# EAGLE board sensor (EAGLE 9.6.2)
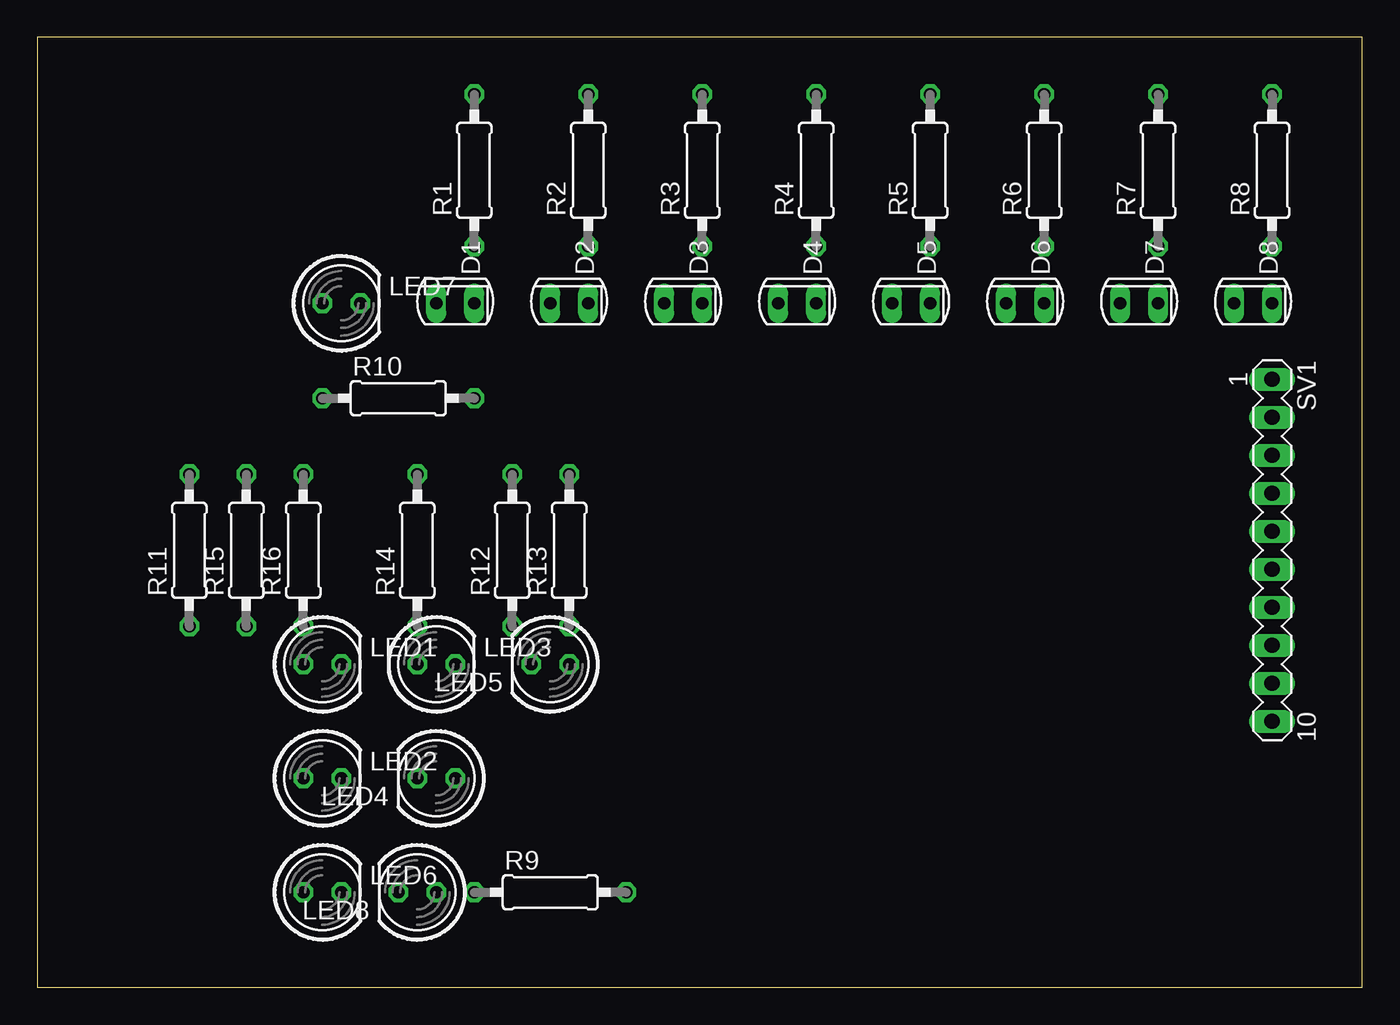
[diagram p0: board, top side]
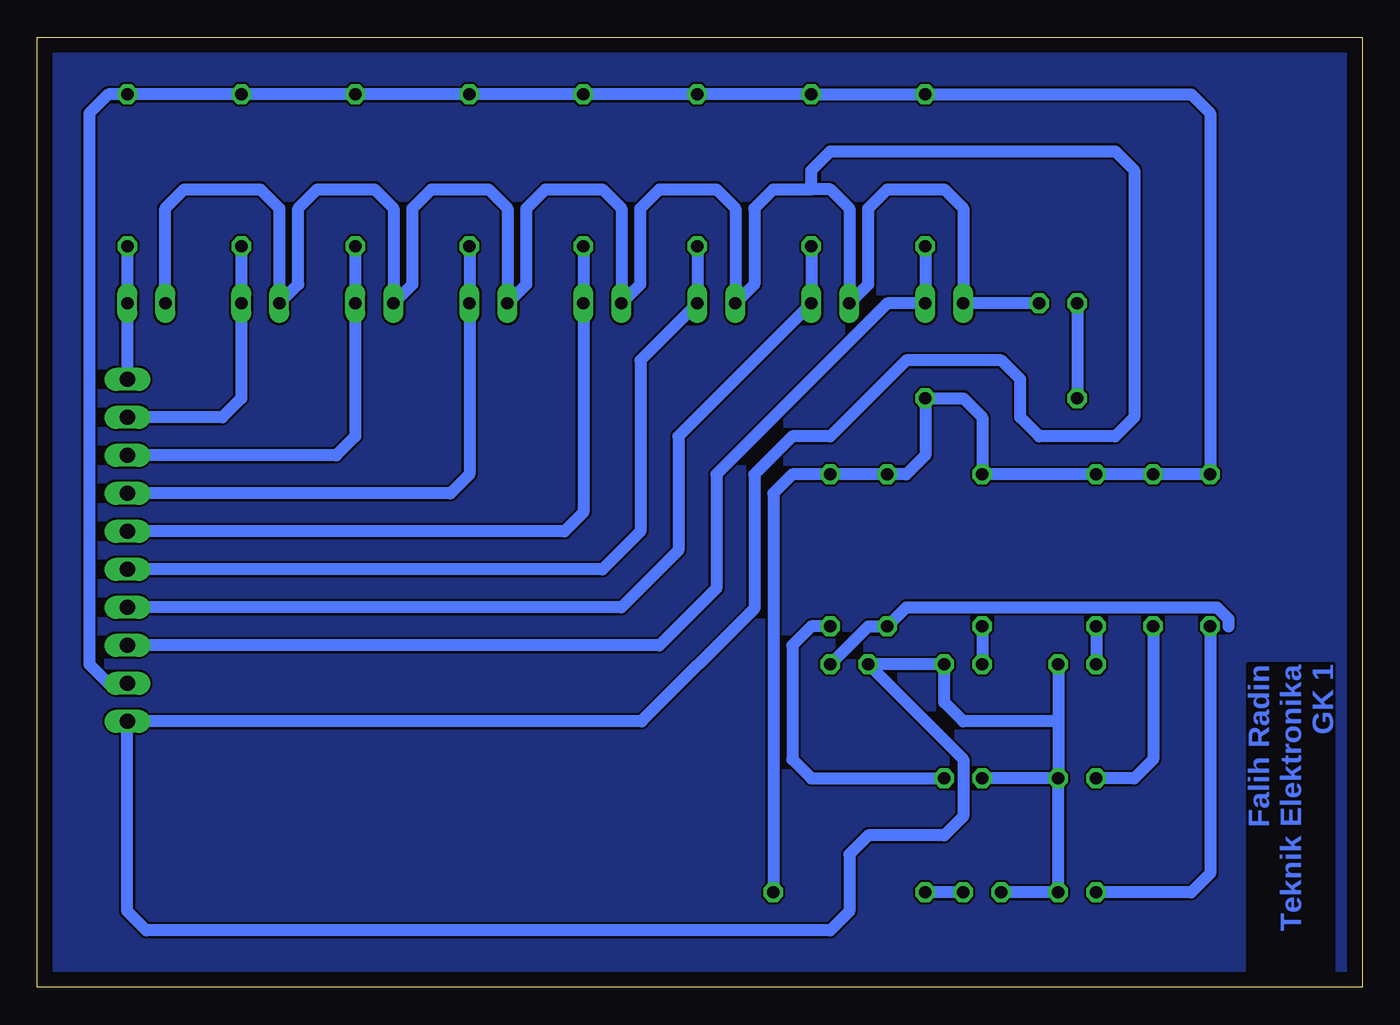
[diagram p1: board, bottom side, seen from below]

Size 88.57 x 63.49 mm. Coordinates in mm from the lower left corner, seen from the top.
Outline: 0,0 88.57,0 88.57,63.49 0,63.49 0,0
Copper layers (1*16): Top 0.035mm / dielectric 1.5mm / Bottom 0.035mm
Design rules "default": minimum track width 6mil, minimum drill 0.35mm, track to track 6mil, track to pad 6mil, pad to pad 6mil, via to via 6mil, smd to smd 6mil, copper to edge 40mil, drill to drill 6mil, minimum pad ring 10mil, minimum via ring 8mil, stop-mask expansion 4mil, vias tented up to drill 0mil, thermal gap 10mil

## Footprints (pad centres in the part's own frame; a part is rotated, then mirrored left to right if it is on the bottom)
SFH225 = drill 0.813 long: A 0,1.27; K 0,-1.27
LED5MM = drill 0.813 octagon: A -1.27,0; K 1.27,0
0207/10 = drill 0.813 octagon: 1 -5.08,0; 2 5.08,0
MA10-1 = drill 1.016 long: 1 -11.43,0; 2 -8.89,0; 3 -6.35,0; 4 -3.81,0; 5 -1.27,0; 6 1.27,0; 7 3.81,0; 8 6.35,0; 9 8.89,0; 10 11.43,0

## Placement (x,y rotation side)
D1  PhotoDioda  [SFH225]  27.94,45.72 90 top
D2  PhotoDioda  [SFH225]  35.56,45.72 90 top
D3  PhotoDioda  [SFH225]  43.18,45.72 90 top
D4  PhotoDioda  [SFH225]  50.8,45.72 90 top
D5  PhotoDioda  [SFH225]  58.42,45.72 90 top
D6  PhotoDioda  [SFH225]  66.04,45.72 90 top
D7  PhotoDioda  [SFH225]  73.66,45.72 90 top
D8  PhotoDioda  [SFH225]  81.28,45.72 90 top
LED1  LED putih SB  [LED5MM]  19.05,21.59 0 top
LED2  LED putih SB  [LED5MM]  19.05,13.97 0 top
LED3  LED putih SB  [LED5MM]  26.67,21.59 0 top
LED4  LED putih SB  [LED5MM]  26.67,13.97 180 top
LED5  LED putih SB  [LED5MM]  34.29,21.59 180 top
LED6  LED putih SB  [LED5MM]  19.05,6.35 0 top
LED7  LED putih SB  [LED5MM]  20.32,45.72 0 top
LED8  LED putih SB  [LED5MM]  25.4,6.35 180 top
R1  [0207/10]  29.21,54.61 90 top
R2  [0207/10]  36.83,54.61 90 top
R3  [0207/10]  44.45,54.61 90 top
R4  [0207/10]  52.07,54.61 90 top
R5  [0207/10]  59.69,54.61 90 top
R6  [0207/10]  67.31,54.61 90 top
R7  [0207/10]  74.93,54.61 90 top
R8  [0207/10]  82.55,54.61 90 top
R9  330  [0207/10]  34.29,6.35 0 top
R10  330  [0207/10]  24.13,39.37 0 top
R11  330  [0207/10]  10.16,29.21 90 top
R12  330  [0207/10]  31.75,29.21 90 top
R13  330  [0207/10]  35.56,29.21 90 top
R14  330  [0207/10]  25.4,29.21 90 top
R15  330  [0207/10]  13.97,29.21 90 top
R16  330  [0207/10]  17.78,29.21 90 top
SV1  [MA10-1]  82.55,29.21 270 top

## Library data of the parts
D1-D8 = opto-trans-siemens
LED1-LED8 = led
R1-R16 = resistor
SV1 = con-lstb

## Nets
GND: D1.A D2.A D3.A D4.A D5.A D6.A D7.A D8.A LED1.K LED2.K LED3.K LED4.K LED5.K LED6.K LED7.K LED8.K SV1.10
N$1: LED7.A R10.1
N$2: D7.K R7.1 SV1.2
N$3: D8.K R8.1 SV1.1
N$4: D1.K R1.1 SV1.8
N$5: D2.K R2.1 SV1.7
N$6: D3.K R3.1 SV1.6
N$7: D5.K R5.1 SV1.4
N$8: D4.K R4.1 SV1.5
N$9: D6.K R6.1 SV1.3
N$10: LED6.A R11.1
N$11: LED5.A R12.1
N$12: LED4.A R13.1
N$13: LED3.A R14.1
N$14: LED2.A R15.1
N$15: LED1.A R16.1
N$16: LED8.A R9.1
VCC: R1.2 R2.2 R3.2 R4.2 R5.2 R6.2 R7.2 R8.2 R9.2 R10.2 R11.2 R12.2 R13.2 R14.2 R15.2 R16.2 SV1.9

## Tracks (layer width: path | path; a pad name or v marks a point on that pad's centre or on a via)
GND
  Bottom 0.813: D8.A 80.01,52.07 78.74,53.34 73.66,53.34 72.39,52.07 D7.A 71.12,46.99 71.12,52.07 69.85,53.34 66.04,53.34 64.77,52.07 D6.A 63.5,46.99 63.5,52.07 62.23,53.34 58.42,53.34 57.15,52.07 D5.A 55.88,46.99 55.88,52.07 54.61,53.34 50.8,53.34 49.53,52.07 D4.A 48.26,46.99 48.26,52.07 46.99,53.34 43.18,53.34 41.91,52.07 D3.A 40.64,46.99 40.64,52.07 39.37,53.34 36.83,53.34 | 36.83,53.34 35.56,53.34 34.29,52.07 D2.A 33.02,46.99 33.02,52.07 31.75,53.34 27.94,53.34 26.67,52.07 D1.A LED7.K | 36.83,53.34 36.83,54.61 35.56,55.88 16.51,55.88 15.24,54.61 15.24,38.1 16.51,36.83 21.59,36.83 22.86,38.1 22.86,40.64 24.13,41.91 30.48,41.91 35.56,36.83 38.1,36.83 40.64,34.29 40.64,25.31 48.16,17.78 SV1.10 82.55,5.08 81.28,3.81 35.56,3.81 34.29,5.08 34.29,8.89 33.02,10.16 27.94,10.16 26.67,11.43 26.67,15.24 LED5.K LED3.K 27.94,19.05 26.67,17.78 20.32,17.78 | LED1.K 20.32,17.78 | 20.32,17.78 LED2.K | LED2.K LED6.K LED8.K | LED2.K LED4.K
N$1
  Bottom 0.813: LED7.A R10.1
N$2
  Bottom 0.813: R7.1 D7.K 74.93,39.37 76.2,38.1 SV1.2
N$3
  Bottom 0.813: R8.1 D8.K SV1.1
N$4
  Bottom 0.813: R1.1 D1.K 31.75,45.72 43.18,34.29 43.18,26.67 46.99,22.86 SV1.8
N$5
  Bottom 0.813: R2.1 D2.K 45.72,36.83 45.72,29.21 49.53,25.4 SV1.7
N$6
  Bottom 0.813: R3.1 D3.K 48.26,41.91 48.26,30.48 50.8,27.94 SV1.6
N$7
  Bottom 0.813: R5.1 D5.K 59.69,34.29 60.96,33.02 SV1.4
N$8
  Bottom 0.813: R4.1 D4.K 52.07,31.75 53.34,30.48 SV1.5
N$9
  Bottom 0.813: R6.1 D6.K 67.31,36.83 68.58,35.56 SV1.3
N$10
  Bottom 0.813: R11.1 10.16,7.62 11.43,6.35 LED6.A
N$11
  Bottom 0.813: 8.94,24.13 8.94,24.64 9.71,25.4 30.48,25.4 R12.1 33.02,24.13 LED5.A
N$12
  Bottom 0.813: R13.1 36.83,24.13 38.1,22.86 38.1,15.24 36.83,13.97 LED4.A
N$13
  Bottom 0.813: R14.1 LED3.A
N$14
  Bottom 0.813: R15.1 13.97,15.24 15.24,13.97 LED2.A
N$15
  Bottom 0.813: R16.1 LED1.A
N$16
  Bottom 0.813: LED8.A R9.1
N$17
  pour Bottom: 0,63.5 88.9,63.5 88.9,0 0,0
VCC
  Bottom 0.813: R2.2 R3.2 R4.2 R5.2 R6.2 R7.2 R8.2 83.82,59.69 85.09,58.42 85.09,21.59 83.82,20.32 SV1.9 | R2.2 R1.2 | R2.2 11.43,59.69 10.16,58.42 R11.2 R15.2 R16.2 R14.2 25.4,38.1 26.67,39.37 R10.2 29.21,35.56 30.48,34.29 R12.2 R13.2 38.1,34.29 39.37,33.02 R9.2

## Text on the board
Bottom: Falih Radin / Teknik Elektronika / GK 1